# EAGLE board g (EAGLE 7.1.0)
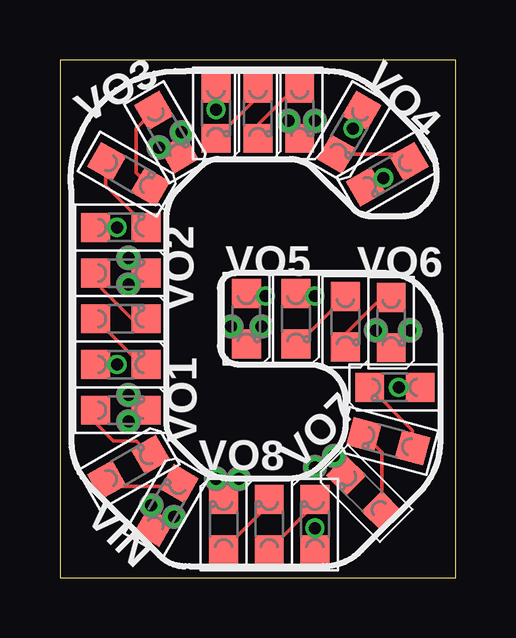
[diagram p0: board, top side]
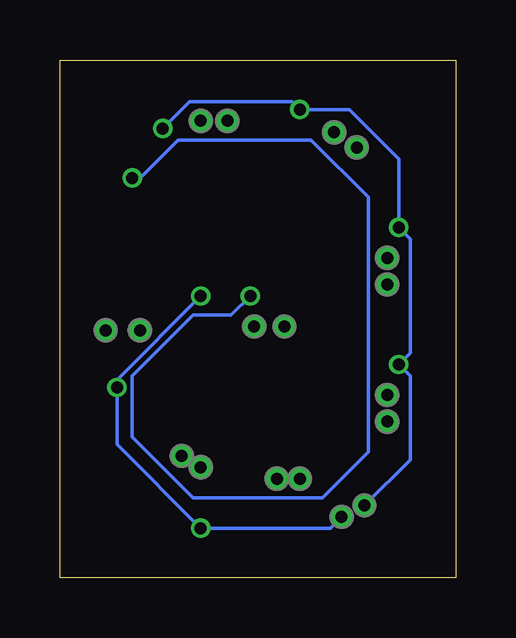
[diagram p1: board, bottom side, seen from below]

Size 16.51 x 21.59 mm. Coordinates in mm from the lower left corner, seen from the top.
Outline: 0,0 16.51,0 16.51,21.59 0,21.59 0,0
Copper layers (1*16): Top 0.035mm / dielectric 1.5mm / Bottom 0.035mm
Design rules "Fusion_eagle_rule_v1.1_tms *": minimum track width 6mil, minimum drill 12mil, track to track 6mil, track to pad 6mil, pad to pad 6mil, via to via 6mil, smd to smd 0mil, copper to edge 10mil, drill to drill 10mil, minimum pad ring 10mil, minimum via ring 6mil, stop-mask expansion 2mil, vias tented up to drill 100mil, thermal gap 10mil

## Footprints (pad centres in the part's own frame; a part is rotated, then mirrored left to right if it is on the bottom)
LED_0805 = smd 1.2 x 1.2: A 0,-1.05; C 0,1.05
P1-20 = drill 0.5: TP 0,0

## Placement (x,y rotation side)
LED1  [LED_0805]  4.45,3.02 330 top
LED2  [LED_0805]  2.86,4.6 300 top
LED3  [LED_0805]  2.54,6.99 270 top
LED4  [LED_0805]  2.54,8.89 270 top
LED5  [LED_0805]  2.54,10.79 270 top
LED6  [LED_0805]  2.54,12.7 270 top
LED7  [LED_0805]  2.54,14.61 270 top
LED8  [LED_0805]  2.86,16.83 240 top
LED9  [LED_0805]  4.45,18.57 210 top
LED10  [LED_0805]  6.51,19.37 180 top
LED11  [LED_0805]  8.26,19.37 180 top
LED12  [LED_0805]  10,19.37 180 top
LED13  [LED_0805]  12.06,18.57 150 top
LED14  [LED_0805]  13.65,16.83 120 top
LED15  [LED_0805]  7.78,10.79 180 top
LED16  [LED_0805]  9.84,10.79 180 top
LED17  [LED_0805]  11.91,10.67 180 top
LED18  [LED_0805]  13.81,10.64 180 top
LED19  [LED_0805]  13.97,7.94 90 top
LED20  [LED_0805]  13.69,5.7 75 top
LED21  [LED_0805]  12.68,3.52 45 top
LED22  [LED_0805]  10.64,2.22 0 top
LED23  [LED_0805]  8.73,2.22 0 top
LED24  [LED_0805]  6.83,2.22 0 top
VIN  [P1-20]  3.81,3.02 0 top
VIN1  [P1-20]  4.76,2.54 0 top
VO1  [P1-20]  2.86,7.62 0 top
VO2  [P1-20]  2.86,12.22 0 top
VO3  [P1-20]  4.13,17.94 0 top
VO4  [P1-20]  10.64,19.05 0 top
VO5  [P1-20]  8.41,10.48 0 top
VO6  [P1-20]  13.18,10.32 0 top
VO7  [P1-20]  11.43,5.08 0 top
VO8  [P1-20]  7.46,4.13 0 top
VO9  [P1-20]  2.86,6.51 0 top
VO10  [P1-20]  2.86,13.34 0 top
VO11  [P1-20]  5.08,18.57 0 top
VO12  [P1-20]  9.53,19.05 0 top
VO13  [P1-20]  7.14,10.48 0 top
VO14  [P1-20]  14.61,10.32 0 top
VO15  [P1-20]  10.64,4.6 0 top
VO16  [P1-20]  6.51,4.13 0 top

## Library data of the parts
LED1-LED24 VIN VIN1 VO1-VO16 = CyberRailGuru

## Nets
N$1: LED22.C LED23.A
N$2: LED23.C LED24.A
N$3: LED2.C LED3.A
N$4: LED1.C LED2.A
N$5: LED24.C VO8.TP VO16.TP
N$7: LED5.C LED6.A
N$8: LED4.C LED5.A
N$11: LED8.C LED9.A
N$12: LED7.C LED8.A
N$15: LED11.C LED12.A
N$16: LED10.C LED11.A
N$19: LED14.C LED15.A
N$20: LED13.C LED14.A
N$23: LED17.C LED18.A
N$24: LED16.C LED17.A
N$27: LED20.C LED21.A
N$28: LED19.C LED20.A
VIN: LED1.A LED4.A LED7.A LED10.A LED13.A LED16.A LED19.A LED22.A VIN1.TP VIN.TP
VOUT1: LED3.C VO1.TP VO9.TP
VOUT2: LED6.C VO2.TP VO10.TP
VOUT3: LED9.C VO3.TP VO11.TP
VOUT4: LED12.C VO4.TP VO12.TP
VOUT5: LED15.C VO5.TP VO13.TP
VOUT6: LED18.C VO6.TP VO14.TP
VOUT7: LED21.C VO7.TP VO15.TP

## Tracks (layer width: path | path; a pad name or v marks a point on that pad's centre or on a via)
N$1
  Top 0.152: LED22.C 10.64,3.08 LED23.A
N$2
  Top 0.152: LED23.C 8.73,3.08 LED24.A
N$3
  Top 0.152: LED3.A 1.49,6.45 2.22,5.71 3.18,5.71 LED2.C
N$4
  Top 0.152: LED2.A 1.79,4.08 1.91,3.81 4.85,3.81 LED1.C
N$5
  Top 0.152: LED24.C 6.83,3.81 VO16.TP VO8.TP
N$7
  Top 0.152: LED5.C 3.02,10.79 1.75,12.06 1.75,12.44 LED6.A
N$8
  Top 0.152: LED4.C 3.4,8.89 LED5.A
N$11
  Top 0.152: LED9.A 3.17,18.73 3.17,16.89 LED8.C
N$12
  Top 0.152: LED7.C 3.59,14.67 1.91,16.35 1.91,17.31 LED8.A
N$15
  Top 0.152: LED11.C 8.26,18.89 9.37,20 9.59,20 LED12.A
N$16
  Top 0.152: 6.51,18.67 LED10.C 8.26,20.06 LED11.A
N$19  (via drill 0.5)
  Top 0.152: LED14.C 13.13,16.3 v13.49,16.67 | LED15.A 8.47,11.85 v8.57,11.75
  Bottom 0.152: v13.49,16.67 13.18,16.67 11.59,18.26 6.03,18.26 3.65,15.88 3.65,5.24 5.56,3.33 10.95,3.33 13.49,5.87 13.49,8.41 10.95,10.95 9.37,10.95 v8.57,11.75
N$20
  Top 0.152: LED13.C 14.25,17.66 LED14.A
N$23
  Top 0.152: LED17.C 11.9,10.16 13.18,11.43 13.55,11.43 LED18.A
N$24
  Top 0.152: LED16.C 9.93,9.74 LED17.A
N$27
  Top 0.152: LED21.A 13.42,5.23 LED20.C
N$28
  Top 0.152: 13.09,7.94 LED19.C 14.71,6.15 LED20.A
VIN  (via drill 0.5)
  Top 0.152: VIN1.TP 4.33,2.11 LED1.A 3.81,2.22 VIN.TP | LED13.A 12.59,19.1 v12.22,18.73 | v6.51,19.53 LED10.A | LED7.A v2.38,14.61 | LED4.A v2.38,8.89 | LED22.A v10.64,2.06 | LED19.A v14.13,7.94 | LED16.A 10.54,11.85 v10.64,11.75
  Bottom 0.152: VIN.TP 1.91,4.92 1.91,8.41 v2.38,8.89 1.91,9.37 1.91,14.13 v2.38,14.61 2.38,17.46 4.45,19.53 v6.51,19.53 6.83,19.84 11.11,19.84 v12.22,18.73 | VIN1.TP 5.24,2.06 v10.64,2.06 14.13,5.56 v14.13,7.94 14.13,8.26 v10.64,11.75
VOUT1
  Top 0.152: VO9.TP 3.11,6.51 LED3.C 2.96,7.62 VO1.TP
VOUT2
  Top 0.152: VO2.TP 3.11,12.22 LED6.C 2.96,13.34 VO10.TP
VOUT3
  Top 0.152: VO3.TP 4.7,17.94 LED9.C 5.08,17.77 VO11.TP
VOUT4
  Top 0.152: VO12.TP 9.53,18.79 LED12.C 10.64,18.95 VO4.TP
VOUT5
  Top 0.152: VO13.TP 7.14,10.38 LED15.C 8.41,10.38 VO5.TP
VOUT6
  Top 0.152: VO6.TP 13.18,10.22 LED18.C 14.54,10.32 VO14.TP
VOUT7
  Top 0.152: LED21.C 11.94,4.57 VO7.TP 11.11,5.08 VO15.TP

## Text on the board
201bmp: G